# Altium PCB CSC 002B.PcbDoc (part 1 of 2)
Units mm, origin at the board's own origin, x right, y up, seen from the top; angles counter-clockwise.
Board outline 100 x 70 mm, 4 copper layers (L1, L2, L3, L4), stack 0.592 mm thick; 140 components, 186 nets, 819 pads, 384 vias.
Unrouted connection lines stored in the file: 1.
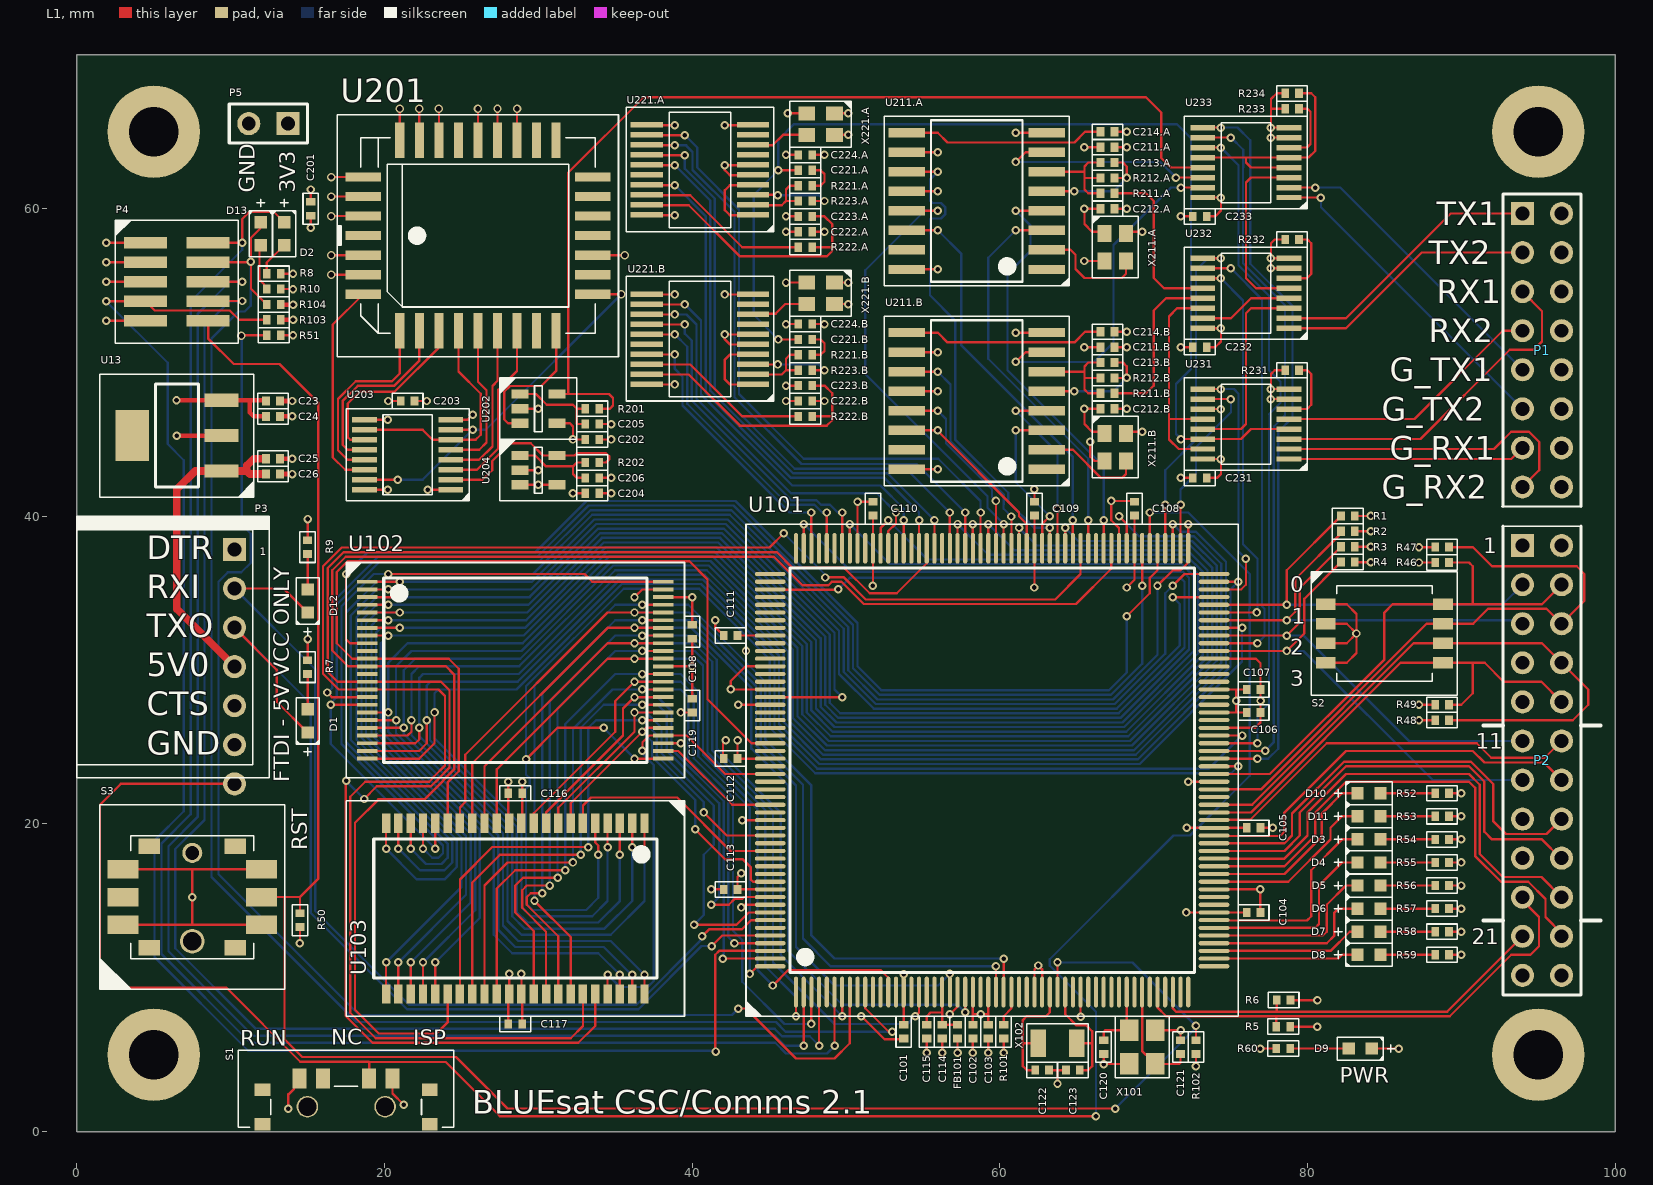
[diagram p0: L1 view]
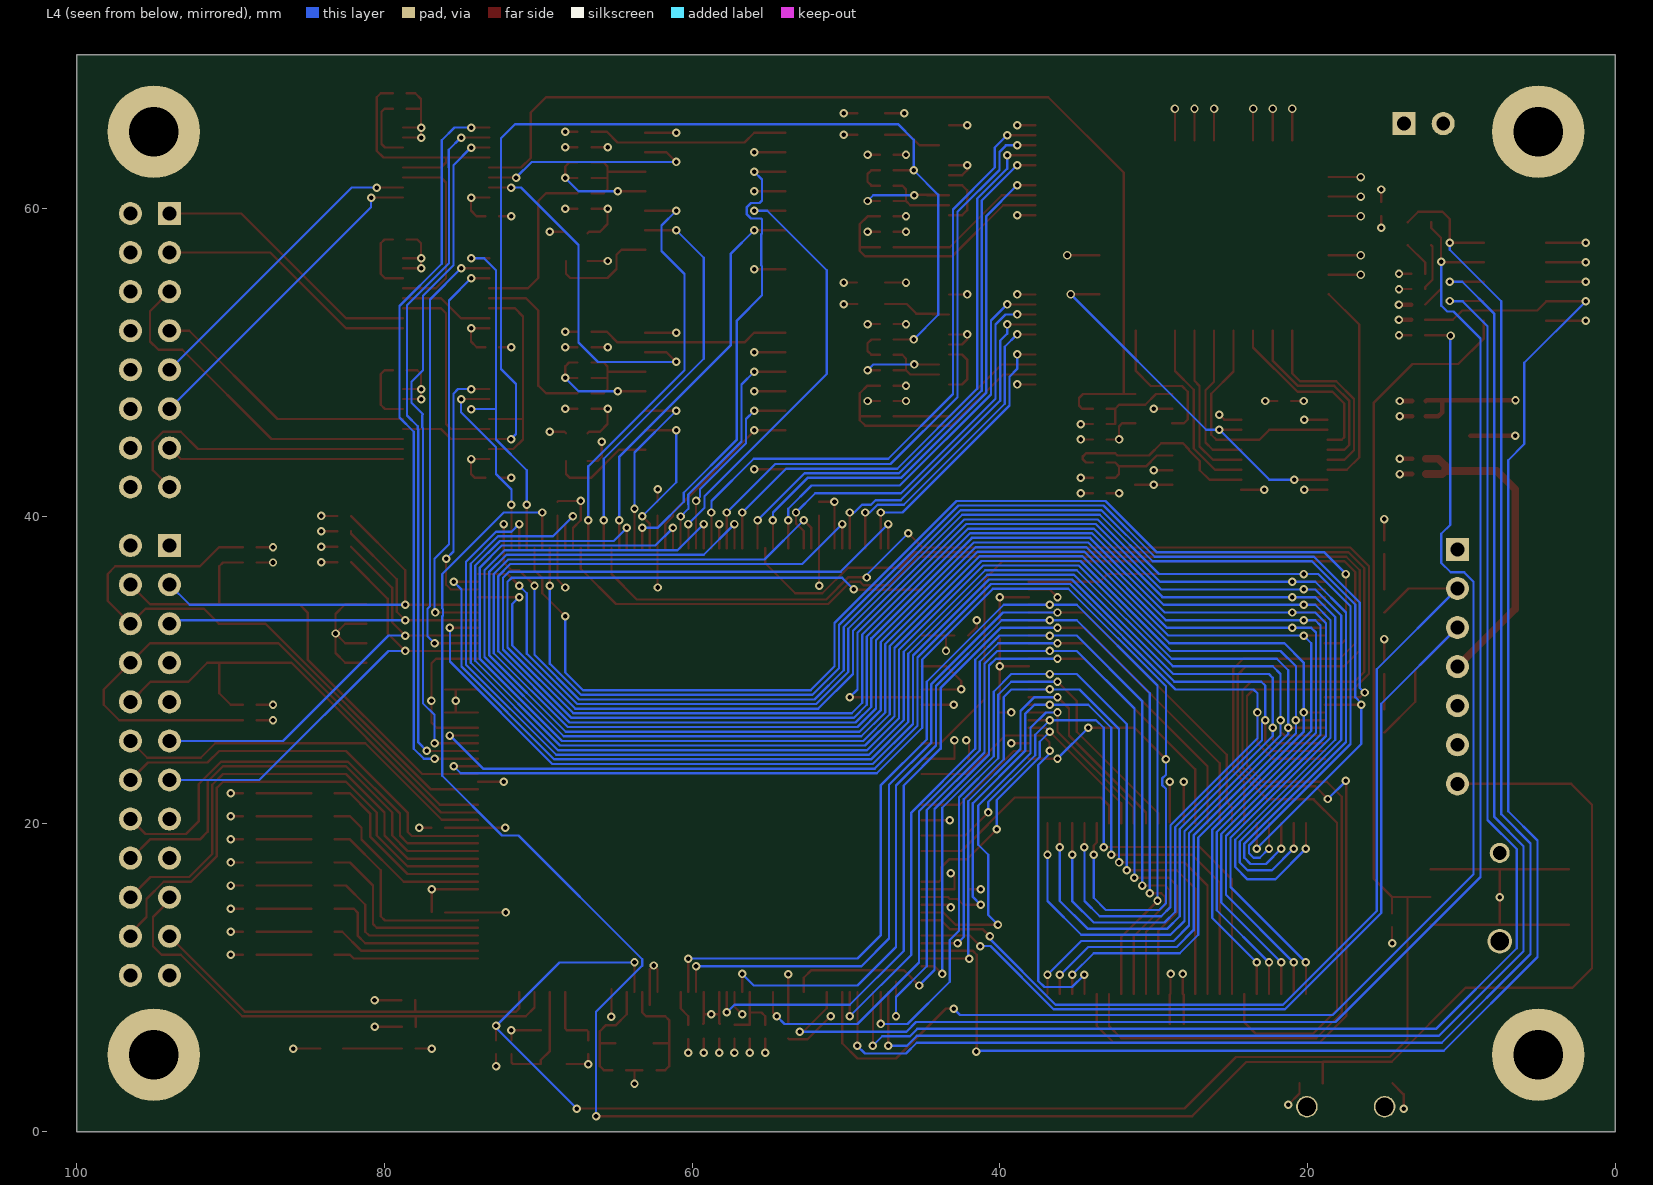
[diagram p1: L4 view, seen from below]
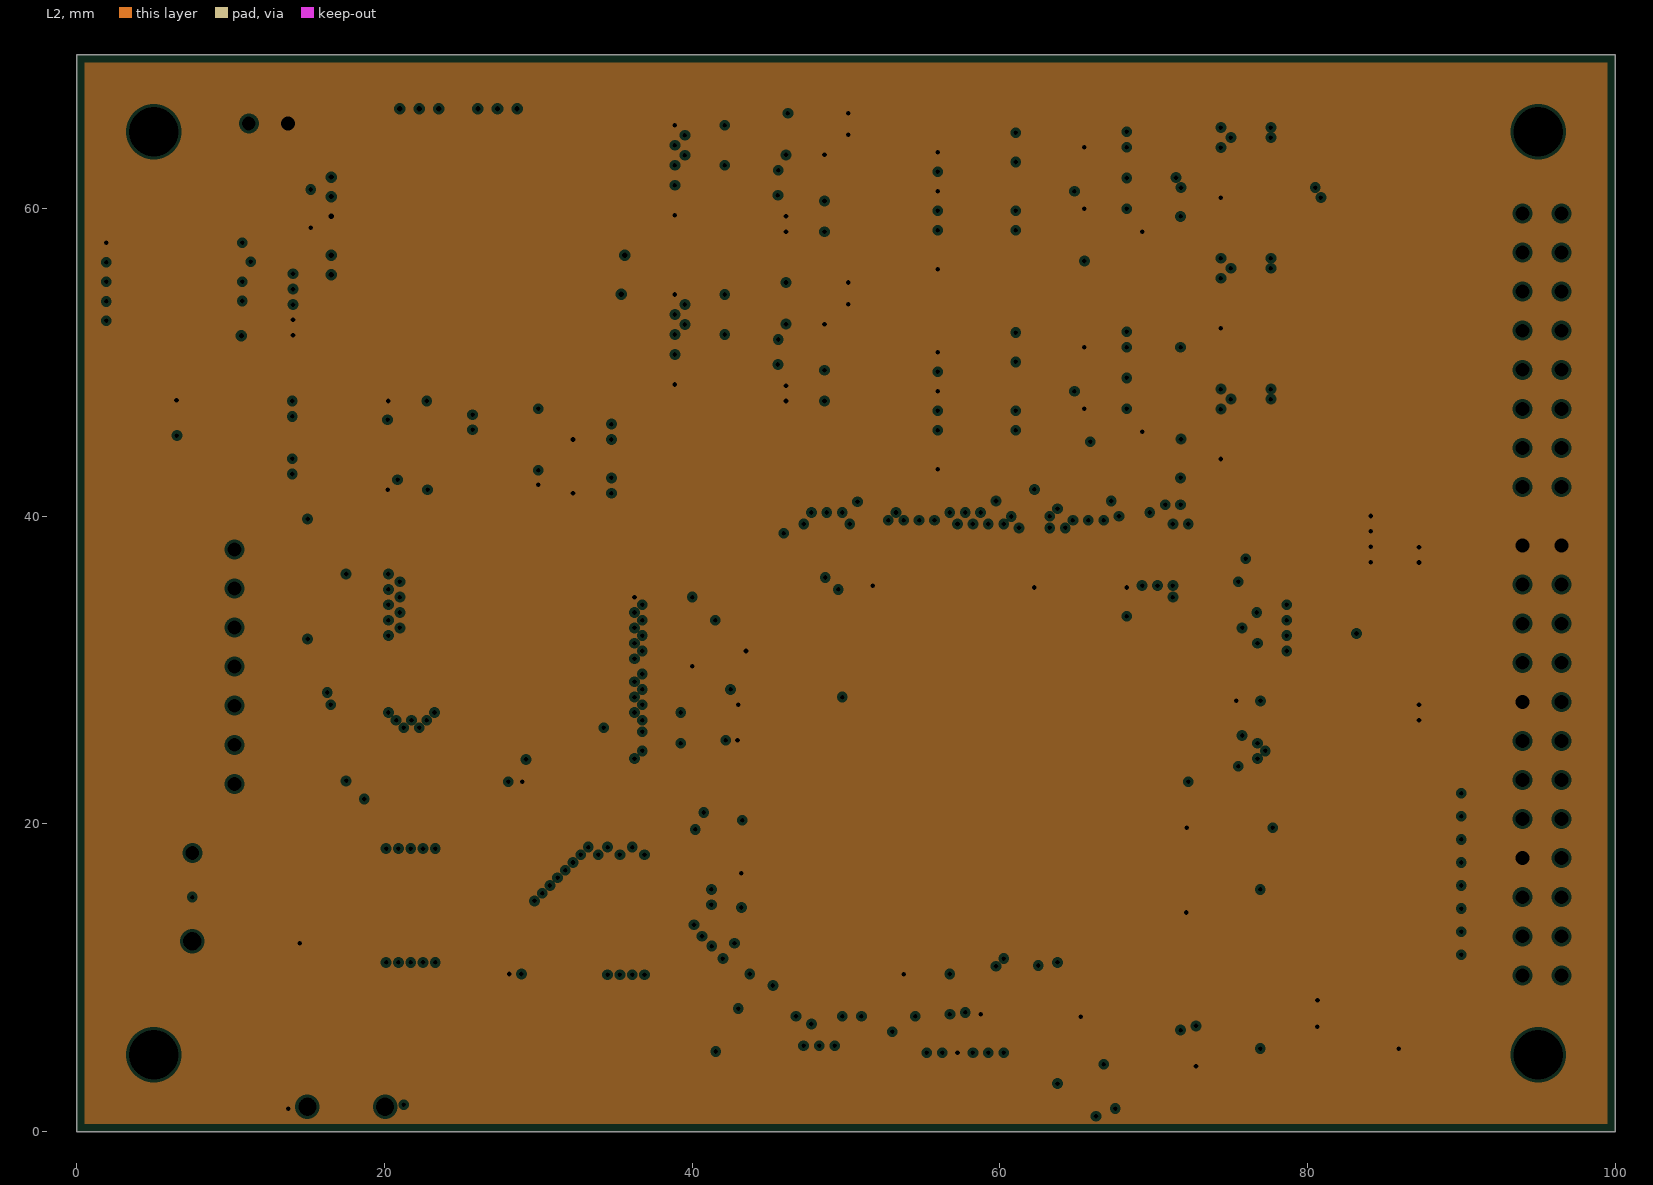
[diagram p2: L2, clearances drawn from the general rule]
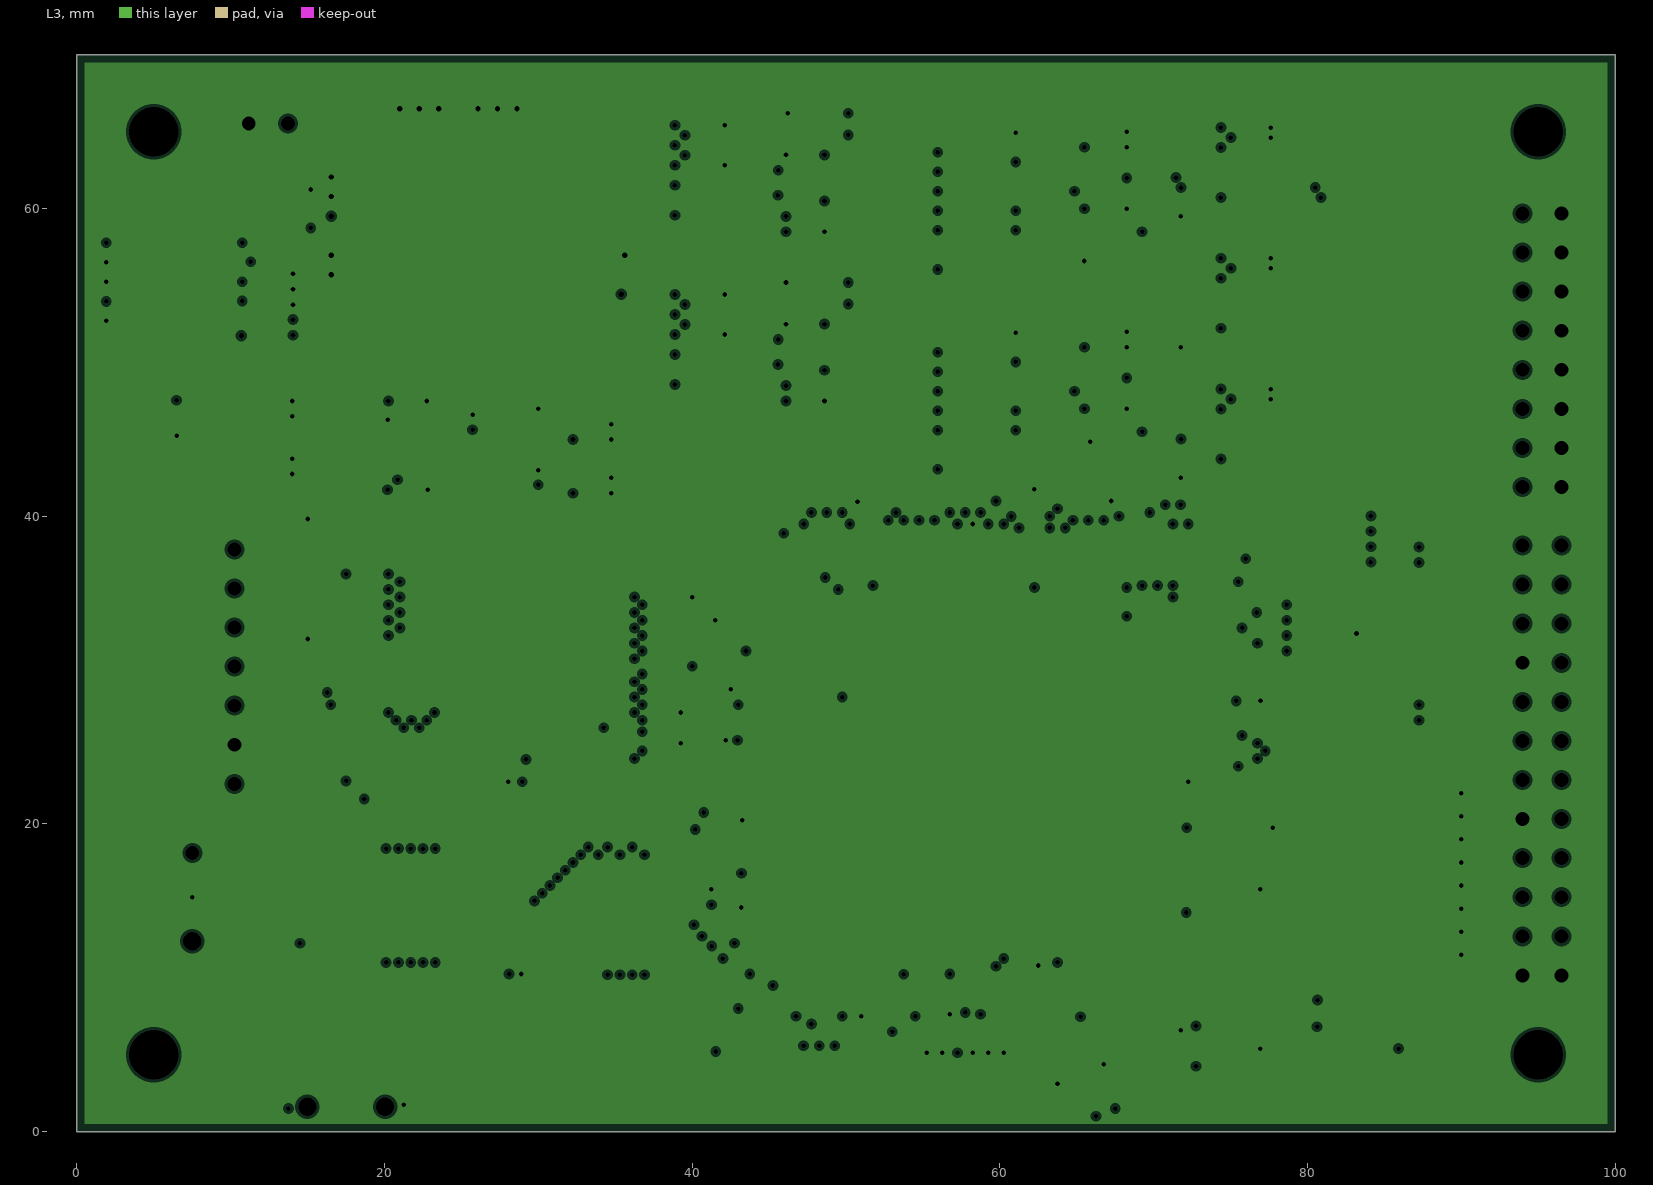
[diagram p3: L3, clearances drawn from the general rule]

## Layer stack, top to bottom
L1: signal copper 0.0356
Dielectric: prepreg 0.065, FR-4, Dk 4.8
L2: plane copper 0.0356, net 3V3
Dielectric: core 0.32, FR-4, Dk 4.8
L3: plane copper 0.0356, net GND
Dielectric: prepreg 0.065, FR-4, Dk 4.8
L4: signal copper 0.0356

## Board outline
0,70 0,0 100,0 100,70

## Design rules (kind name [scope] priority, off if disabled: settings)
AssemblyTestPointUsage [All] p1 off:
AssemblyTestpoint [All] p1 off: testpointundercomponent=TRUE minsize=1.016 maxsize=2.54 preferedsize=1.524 minholesize=0 maxholesize=1.016 preferedholesize=0.813 testpointgrid=0.025 usegrid=TRUE gridtolerance=0 allowsidetop=TRUE allowsidebottom=TRUE
Clearance [All] p1: gap=0.15
FabricationTestPointUsage [All] p1 off: valid=0 allowmultiple=FALSE
FabricationTestpoint [All] p1 off: side=3 testpointundercomponent=TRUE minsize=1.016 maxsize=2.54 preferedsize=1.524 minholesize=0 maxholesize=1.016 preferedholesize=0.813 testpointgrid=0.025 allowsidetop=TRUE allowsidebottom=TRUE usegrid=TRUE gridtolerance=0
HoleSize HoleSize_1 [All] p1: absolutevalues=TRUE maxlimit=3.7 minlimit=0.025 maxpercent=80.000 minpercent=20.000
HoleToHoleClearance [All] p1: gap=0.2 allowstackedmicrovias=TRUE
MinimumSolderMaskSliver [All] p1: minsoldermaskwidth=0.07
PlaneClearance [All] p1: clearance=0.2
PlaneConnect [All] p1: planeconnectstyle=Relief reliefexpansion=0.508 reliefentries=4 reliefconductorwidth=0.254 reliefairgap=0.254
PolygonConnect [All] p1: connectstyle=Relief reliefconductorwidth=0.254 reliefentries=4 polygonreliefangle="90 Angle" airgapwidth=0.254
RoomDefinition U_SwC_Main [InComponentClass('U_SwC_Main')] p1: confinementstyle=ConfineIn formatcopy=TRUE lockcomponents=FALSE outline 71.5,41.5 85,41.5 85,68.5 71.5,68.5
RoomDefinition D2 [InComponentClass('D2')] p2: confinementstyle=ConfineIn formatcopy=TRUE lockcomponents=FALSE outline 35.5,45.5 51.5,45.5 51.5,56.5 35.5,56.5
RoomDefinition D1 [InComponentClass('D1')] p3: confinementstyle=ConfineIn formatcopy=TRUE lockcomponents=FALSE outline 35.5,56.5 51.5,56.5 51.5,67.5 35.5,67.5
RoomDefinition Beacon [InComponentClass('Beacon')] p4: confinementstyle=ConfineIn formatcopy=TRUE lockcomponents=FALSE outline 14.475,40 37.5,40 37.5,67.5 14.475,67.5
RoomDefinition A2 [InComponentClass('A2')] p5: confinementstyle=ConfineIn formatcopy=TRUE lockcomponents=FALSE outline 51.5,41.5 71.5,41.5 71.5,54.5 51.5,54.5
RoomDefinition A1 [InComponentClass('A1')] p6: confinementstyle=ConfineIn formatcopy=TRUE lockcomponents=FALSE outline 51.5,54.5 71.5,54.5 71.5,67.5 51.5,67.5
RoutingTopology [All] p1: topology=Daisy_Balanced
RoutingVias BuriedVia [(StartLayer = 'L2')and(StopLayer = 'L3')] p1: holewidth=0.25 width=0.55 viastyle="Through Hole" minholewidth=0.25 minwidth=0.55 maxholewidth=0.25 maxwidth=0.55
RoutingVias ThroughVia [((StartLayer = 'L1') and (StopLayer = 'L4'))] p2: holewidth=0.25 width=0.6 viastyle="Through Hole" minholewidth=0.25 minwidth=0 maxholewidth=0.25 maxwidth=0.6
RoutingVias MicroVia [((StartLayer = 'L1') and (StopLayer = 'L2')) or ((StartLayer = 'L3') and (StopLayer = 'L4'))] p3: holewidth=0.1 width=0.3 viastyle="Through Hole" minholewidth=0.1 minwidth=0.3 maxholewidth=0.1 maxwidth=0.3
SilkToSilkClearance [All] p1: silktosilkclearance=0.1
SilkToSolderMaskClearance SilkscreenOverComponentPads [IsPad] p1: minsilkscreentomaskgap=0.1 clearancetoexposedcopper=TRUE
SolderMaskExpansion [All] p1: expansion=0.05
Width [All] p1: maxlimit=2 minlimit=0.1 preferedwidth=0.1
16 further rules are at their usual default settings.

## Classes and differential pairs
component class Designator: C23 C24 C25 C26 D1 D2 D3 D4 D5 D6 D7 D8 D9 D10 D11 D12 D13 P1 P2 P3 P4 P5 R1 R2 R3 R4 R5 R6 R7 R8 R9 R10 R46 R47 R48 R49 R50 R51 R52 R53 R54 R55 R56 R57 R58 R59 R60 S1 S2 S3 U13
net class LED[0..7]: LED0 LED1 LED2 LED3 LED4 LED5 LED6 LED7
net class EXT[0..9]: EXT0 EXT1 EXT2 EXT3 EXT4 EXT5 EXT6 EXT7 EXT8 EXT9
channel class COMS0003_DTMF: D1 D2
channel class COMS0002_AFSK: A1 A2
net class CONTROL.SWC[0..7]: CONTROL.SWC0 CONTROL.SWC1 CONTROL.SWC2 CONTROL.SWC3 CONTROL.SWC4 CONTROL.SWC5 CONTROL.SWC6 CONTROL.SWC7
net class CONTROL.DTMF2.Q[1..4]: CONTROL.DTMF2.Q1 CONTROL.DTMF2.Q2 CONTROL.DTMF2.Q3 CONTROL.DTMF2.Q4
net class CONTROL.DTMF1.Q[1..4]: CONTROL.DTMF1.Q1 CONTROL.DTMF1.Q2 CONTROL.DTMF1.Q3 CONTROL.DTMF1.Q4
net class ADDRESS[0..7]: ADDRESS0 ADDRESS1 ADDRESS2 ADDRESS3 ADDRESS4 ADDRESS5 ADDRESS6 ADDRESS7
component class U_SwC_Main: 243 C231 C232 C233 C241 C251 C261 R231 R232 R233 R234 R241 R251 R252 R261 U231 U232 U233
component class D2: C221.B C221_D2 C222.B C222_D2 C223.B C223_D2 C224.B C224_D2 R221.B R221_D2 R222.B R222_D2 R223.B R223_D2 U221.B U221_D2 X221.B X221_D2
component class D1: C221.A C221_D1 C222.A C222_D1 C223.A C223_D1 C224.A C224_D1 R221.A R221_D1 R222.A R222_D1 R223.A R223_D1 U221.A U221_D1 X221.A X221_D1
component class Beacon: C201 C202 C203 C204 C205 C206 R201 R202 U201 U202 U203 U204
component class A2: C211.B C211_A2 C212.B C212_A2 C213.B C213_A2 C214.B C214_A2 R211.B R211_A2 R212.B R212_A2 U211.B U211_A2 X211.B X211_A2
component class A1: C211.A C211_A1 C212.A C212_A1 C213.A C213_A1 C214.A C214_A1 R211.A R211_A1 R212.A R212_A1 U211.A U211_A1 X211.A X211_A1
net class A[0..19]: A0 A1 A2 A3 A4 A5 A6 A7 A8 A9 A10 A11 A12 A13 A14 A15 A16 A17 A18 A19
net class D[0..15]: D0 D1 D2 D3 D4 D5 D6 D7 D8 D9 D10 D11 D12 D13 D14 D15
component class CRSC0002: C14 C101 C102 C103 C104 C105 C106 C107 C108 C109 C110 C111 C112 C113 C114 C115 C116 C117 C118 C119 C120 C121 C122 C123 FB101 Q101 Q102 R101 R102 R103 R104 U101 U102 U103 X101 X102

## Components (designator, comment, footprint, x,y, rotation, side; value= is the part's Value field where it differs from the comment)
C23 "Cap 0402" CAPC1005X06L 12.75,47.5 r180 top
C24 "Cap 0402" CAPC1005X06L 12.75,46.5 r180 top
C25 "Cap 0402" CAPC1005X06L 12.75,43.75 r180 top
C26 "Cap 0402" CAPC1005X06L 12.75,42.75 r180 top
C101 "Cap 0402" CAPC1005X06L 53.75,6.5 r90 top
C102 "Cap 0402" CAPC1005X06L 58.25,6.5 r90 top
C103 "Cap 0402" CAPC1005X06L 59.25,6.5 r90 top
C104 "Cap 0402" CAPC1005X06L 76.5,14.25 r180 top
C105 "Cap 0402" CAPC1005X06L 76.5,19.75 r180 top
C106 "Cap 0402" CAPC1005X06L 76.5,27.25 r180 top
C107 "Cap 0402" CAPC1005X06L 76.5,28.75 r180 top
C108 "Cap 0402" CAPC1005X06L 68.75,40.5 r270 top
C109 "Cap 0402" CAPC1005X06L 62.25,40.5 r270 top
C110 "Cap 0402" CAPC1005X06L 51.75,40.5 r270 top
C111 "Cap 0402" CAPC1005X06L 42.5,32.25 r0 top
C112 "Cap 0402" CAPC1005X06L 42.5,24.25 r0 top
C113 "Cap 0402" CAPC1005X06L 42.5,15.75 r0 top
C114 "Cap 0402" CAPC1005X06L 56.25,6.5 r90 top
C115 "Cap 0402" CAPC1005X06L 55.25,6.5 r90 top
C116 "Cap 0402" CAPC1005X06L 28.5,22 r0 top
C117 "Cap 0402" CAPC1005X06L 28.5,7 r180 top
C118 "Cap 0402" CAPC1005X06L 40,32.5 r270 top
C119 "Cap 0402" CAPC1005X06L 40,27.7 r90 top
C120 "Cap 0402" CAPC1005X06L 66.75,5.5 r270 top
C121 "Cap 0402" CAPC1005X06L 71.75,5.5 r270 top
C122 "Cap 0402" CAPC1005X06L 62.75,4 r0 top
C123 "Cap 0402" CAPC1005X06L 64.75,4 r0 top
C201 "Cap 0402" CAPC1005X06L 15.2,60 r90 top
C202 "Cap 0402" CAPC1005X06L 33.5,45 r0 top
C203 "Cap 0402" CAPC1005X06L 21.5,47.5 r0 top
C204 "Cap 0402" CAPC1005X06L 33.5,41.5 r180 top
C205 "Cap 0402" CAPC1005X06L 33.5,46 r180 top
C206 "Cap 0402" CAPC1005X06L 33.5,42.5 r180 top
C211.A "Cap 0402" CAPC1005X06L 67,64 r180 top (schematic designator C211)
C211.B "Cap 0402" CAPC1005X06L 67,51 r180 top (schematic designator C211)
C212.A "Cap 0402" CAPC1005X06L 67,60 r180 top (schematic designator C212)
C212.B "Cap 0402" CAPC1005X06L 67,47 r180 top (schematic designator C212)
C213.A "Cap 0402" CAPC1005X06L 67,63 r180 top (schematic designator C213)
C213.B "Cap 0402" CAPC1005X06L 67,50 r180 top (schematic designator C213)
C214.A "Cap 0402" CAPC1005X06L 67,65 r180 top (schematic designator C214)
C214.B "Cap 0402" CAPC1005X06L 67,52 r180 top (schematic designator C214)
C221.A "Cap 0402" CAPC1005X06L 47.35,62.5 r180 top (schematic designator C221)
C221.B "Cap 0402" CAPC1005X06L 47.35,51.5 r180 top (schematic designator C221)
C222.A "Cap 0402" CAPC1005X06L 47.35,58.5 r180 top (schematic designator C222)
C222.B "Cap 0402" CAPC1005X06L 47.35,47.5 r180 top (schematic designator C222)
C223.A "Cap 0402" CAPC1005X06L 47.35,59.5 r0 top (schematic designator C223)
C223.B "Cap 0402" CAPC1005X06L 47.35,48.5 r0 top (schematic designator C223)
C224.A "Cap 0402" CAPC1005X06L 47.35,63.5 r180 top (schematic designator C224)
C224.B "Cap 0402" CAPC1005X06L 47.35,52.5 r180 top (schematic designator C224)
C231 "Cap 0402" CAPC1005X06L 73,42.5 r0 top
C232 "Cap 0402" CAPC1005X06L 73,51 r0 top
C233 "Cap 0402" CAPC1005X06L 73,59.5 r0 top
D1 "LED - ASMT-Rx45" ASMT-Rx45 15,26.7 r90 top
D2 "LED - ASMT-Rx45" ASMT-Rx45 13.475,58.375 r270 top
D3 "LED - ASMT-Rx45" ASMT-Rx45 84,19 r0 top
D4 "LED - ASMT-Rx45" ASMT-Rx45 84,17.5 r0 top
D5 "LED - ASMT-Rx45" ASMT-Rx45 84,16 r0 top
D6 "LED - ASMT-Rx45" ASMT-Rx45 84,14.5 r0 top
D7 "LED - ASMT-Rx45" ASMT-Rx45 84,13 r0 top
D8 "LED - ASMT-Rx45" ASMT-Rx45 84,11.5 r0 top
D9 "LED - ASMT-Rx45" ASMT-Rx45 83.425,5.4 r180 top
D10 "LED - ASMT-Rx45" ASMT-Rx45 84,22 r0 top
D11 "LED - ASMT-Rx45" ASMT-Rx45 84,20.5 r0 top
D12 "LED - ASMT-Rx45" ASMT-Rx45 15,34.5 r90 top
D13 "LED - ASMT-Rx45" ASMT-Rx45 11.95,58.375 r270 top
FB101 "Ferite Bead 0402" INDC1005X06L 57.25,6.5 r90 top
P1 "Header 8X2" HDR2X8 93.98,59.69 r270 top
P2 "Header 12X2" HDR2X12 93.98,38.1 r270 top
P3 "FTDI Basic" "FTDI BASIC" 0,31.5 r0 top
P4 "Cortex Debug Connector" FTSH-105-01-L-DV-TR 6.5,55.25 r270 top
P5 "Header 2" HDR1X2 13.716,65.532 r180 top
R1 "Res3" RESC1005X06L 82.625,40.025 r0 top
R2 "Res3" RESC1005X06L 82.625,39.025 r0 top
R3 "Res3" RESC1005X06L 82.625,38.025 r0 top
R4 "Res3" RESC1005X06L 82.625,37.025 r0 top
R5 "Res3" RESC1005X06L 78.425,6.825 r0 top
R6 "Res3" RESC1005X06L 78.45,8.55 r0 top
R7 "Res3" RESC1005X06L 15,30.2 r90 top
R8 "Res3" RESC1005X06L 12.8,55.775 r0 top
R9 "Res3" RESC1005X06L 15,38 r90 top
R10 "Res3" RESC1005X06L 12.8,54.775 r0 top
R46 "Res3" RESC1005X06L 88.75,37 r0 top
R47 "Res3" RESC1005X06L 88.75,38 r0 top
R48 "Res3" RESC1005X06L 88.75,26.75 r0 top
R49 "Res3" RESC1005X06L 88.75,27.75 r0 top
R50 "Res3" RESC1005X06L 14.5,13.75 r90 top
R51 "Res3" RESC1005X06L 12.8,51.775 r0 top
R52 "Res3" RESC1005X06L 88.75,22 r0 top
R53 "Res3" RESC1005X06L 88.75,20.5 r0 top
R54 "Res3" RESC1005X06L 88.75,19 r0 top
R55 "Res3" RESC1005X06L 88.75,17.5 r0 top
R56 "Res3" RESC1005X06L 88.75,16 r0 top
R57 "Res3" RESC1005X06L 88.75,14.5 r0 top
R58 "Res3" RESC1005X06L 88.75,13 r0 top
R59 "Res3" RESC1005X06L 88.75,11.5 r0 top
R60 "Res3" RESC1005X06L 78.425,5.4 r180 top
R101 "Res3" RESC1005X06L 60.25,6.5 r270 top
R102 "Res3" RESC1005X06L 72.75,5.5 r270 top
R103 "Res3" RESC1005X06L 12.8,52.775 r0 top
R104 "Res3" RESC1005X06L 12.8,53.775 r0 top
R201 "Res3" RESC1005X06L 33.5,47 r180 top
R202 "Res3" RESC1005X06L 33.5,43.5 r180 top
R211.A "Res3" RESC1005X06L 67,61 r0 top (schematic designator R211)
R211.B "Res3" RESC1005X06L 67,48 r0 top (schematic designator R211)
R212.A "Res3" RESC1005X06L 67,62 r0 top (schematic designator R212)
R212.B "Res3" RESC1005X06L 67,49 r0 top (schematic designator R212)
R221.A "Res3" RESC1005X06L 47.35,61.5 r180 top (schematic designator R221)
R221.B "Res3" RESC1005X06L 47.35,50.5 r180 top (schematic designator R221)
R222.A "Res3" RESC1005X06L 47.35,57.5 r180 top (schematic designator R222)
R222.B "Res3" RESC1005X06L 47.35,46.5 r180 top (schematic designator R222)
R223.A "Res3" RESC1005X06L 47.35,60.5 r0 top (schematic designator R223)
R223.B "Res3" RESC1005X06L 47.35,49.5 r0 top (schematic designator R223)
R231 "Res3" RESC1005X06L 79,49.5 r180 top
R232 "Res3" RESC1005X06L 79,58 r180 top
R233 "Res3" RESC1005X06L 79,66.5 r180 top
R234 "Res3" RESC1005X06L 79,67.5 r0 top
S1 "MLL1300S" MILL1300S 17.5,0.3 r0 top
S2 "SW-DIP4" PCBComponent_1 85,32.385 r270 top
S3 "KS2A" K5A2 7.5,15.25 r90 top
U13 "MIC5200" SOT230P710X170-4L 6.5,45.25 r180 top
U101 "LPC2468FBD208" TSQFP50P3000X3000X160-208L 59.5,23.5 r90 top
U102 "CY62167DV30LL" TSSOP50P2000X120-48L 28.5,30 r0 top
U103 "FM22L16-55-TG" TSOP80P1180X120-44L 28.5,14.5 r180 top
U201 "AT27LV512A" PLCC7*9 26.075,58.25 r90 top
U202 "IttyBitty Timer" SOT23-5 30,47 r0 top
U203 "CD4520BPW" TSSOP16 21.5,44 r90 top
U204 "IttyBitty Timer" SOT23-5 30,43 r0 top
U211.A "MX614TN" SOIC16 58.5,60.5 r180 top (schematic designator U211)
U211.B "MX614TN" SOIC16 58.5,47.5 r180 top (schematic designator U211)
U221.A "MT88L70AN" TSSOP20 40.5,62.5 r90 top (schematic designator U221)
U221.B "MT88L70AN" TSSOP20 40.5,51.5 r90 top (schematic designator U221)
U231 "CD4053BCM" TSSOP16 76,46 r90 top
U232 "CD4053BCM" TSSOP16 76,54.5 r90 top
U233 "CD4051BCM" TSSOP16 76,63 r90 top
X101 "Crystal Oscilator" 7M 69.25,5.5 r270 top
X102 "Crystal Oscilator" "9H T10" 63.75,5.75 r180 top
X211.A "ECS-2025-035" ECS-2025 67.5,57.5 r270 top (schematic designator X211)
X211.B "ECS-2025-035" ECS-2025 67.5,44.5 r270 top (schematic designator X211)
X221.A "ECS-2025-035" ECS-2025 48.35,65.5 r180 top (schematic designator X221)
X221.B "ECS-2025-035" ECS-2025 48.35,54.5 r180 top (schematic designator X221)

## Footprints (in the part's own frame and the unit in brackets; to place one, negate y for a bottom-side part, rotate by r counter-clockwise, add the part's x,y. Pads: shape width x height; smd on the part's side, far side on the other; paste and mask are expansions set on the pad)
7M [mm]
  rect 1.4x1.2 smd: 1(-1.1,-0.85) 2(1.1,0.85) 3(-1.1,0.85) 3(1.1,-0.85)
  silkscreen extent -2,-1.75 2,1.75, body extent -1.6,-1.25 1.6,1.25, height 0.75
"9H T10" [mm]
  rect 1x1.8 smd: 1(-1.25,0) 2(1.25,0)
  silkscreen extent -2,-1.25 2,1.25, body extent -1.6,-0.75 1.6,0.75, height 0.75
ASMT-Rx45 [mm]
  rect 0.8x0.8 smd: 1(-0.75,0) 2(0.75,0)
  silkscreen extent -2.25,-0.75 1.5,0.75, body extent -0.8,-0.4 0.8,0.4, height 0.45
CAPC1005X06L [mm] "Chip Capacitor, 2-Leads, Body 1.0x0.5mm, IPC High Density"
  rect 0.5x0.6 smd: 1(-0.45,0) 2(0.45,0)
  silkscreen extent -1,-0.5 1,0.5, body extent -0.53,-0.28 0.53,0.27, height 0.55
ECS-2025 [mm] "SMD Clock Oscillator"
  rect 1.1x0.9 smd: 1(-0.9,-0.7) 2(0.9,-0.7) 3(0.9,0.7) 4(-0.9,0.7)
  silkscreen extent -2,-1.5 2,1.5, body extent -1.25,-1 1.25,1, height 0.9
"FTDI BASIC" [mm]
  rect 1.5x1.5 hole 0.9: 1(10.25,6.35)
  round 1.5 hole 0.9: 2(10.25,3.81) 3(10.25,1.27) 4(10.25,-1.27) 5(10.25,-3.81) 6(10.25,-6.35)
  silkscreen extent 0,-8.5 12.5,8.5, body extent -0.02,-7.62 10.55,7.62, height 2.51
FTSH-105-01-L-DV-TR [mil] "http://www.samtec.com/ftppub/cpdf/FTSHMKT1.PDF"
  rect 29x110 smd: 1(-100,-80) 2(-100,80) 3(-50,-80) 4(-50,80) 5(0,-80) 6(0,80) 7(50,-80) 8(50,80) 9(100,-80) 10(100,80)
  silkscreen extent -157,-157 157,157, body extent -125,-115 125,115, height 234
HDR1X2 [mm] "Connector; Header; 2 Position"
  rect 1.5x1.5 hole 0.9: 1(0,0)
  round 1.5 hole 0.9: 2(2.54,0)
  silkscreen extent -1.27,-1.27 3.81,1.27
HDR2X8 [mm] "Connector; Header; 8x2 Position"
  rect 1.5x1.5 hole 0.9: 1(0,0)
  round 1.5 hole 0.9: 2(0,2.54) 3(2.54,0) 4(2.54,2.54) 5(5.08,0) 6(5.08,2.54) 7(7.62,0) 8(7.62,2.54) 9(10.16,0) 10(10.16,2.54) 11(12.7,0) 12(12.7,2.54) 13(15.24,0) 14(15.24,2.54) 15(17.78,0) 16(17.78,2.54)
  silkscreen extent -1.27,-1.27 19.05,3.81
HDR2X12 [mm] "Connector; Header; 12x2 Position"
  rect 1.5x1.5 hole 0.9: 1(0,0)
  round 1.5 hole 0.9: 2(0,2.54) 3(2.54,0) 4(2.54,2.54) 5(5.08,0) 6(5.08,2.54) 7(7.62,0) 8(7.62,2.54) 9(10.16,0) 10(10.16,2.54) 11(12.7,0) 12(12.7,2.54) 13(15.24,0) 14(15.24,2.54) 15(17.78,0) 16(17.78,2.54) 17(20.32,0) 18(20.32,2.54) 19(22.86,0) 20(22.86,2.54) 21(25.4,0) 22(25.4,2.54) 23(27.94,0) 24(27.94,2.54)
  silkscreen extent -1.27,-1.27 29.21,3.81
INDC1005X06L [mm] "Chip Inductor, 2-Leads, Body 1.0x0.5mm, IPC High Density"
  rect 0.5x0.6 smd: 1(-0.45,0) 2(0.45,0)
  silkscreen extent -1,-0.5 1,0.5, body extent -0.53,-0.28 0.53,0.27, height 0.55
K5A2 [mm]
  rect 1x1.42 smd: 0(-3.3,-2.8) 0(-3.3,2.8) 8(3.3,-2.8) 9(3.3,2.8)
  round 1.6 hole 1.2: 0(-2.875,0)
  round 1.3 hole 0.9: 0(2.875,0)
  rect 1.2x2 smd: 1(-1.8,4.5) 2(0,4.5) 3(1.8,4.5) 4(-1.8,-4.5) 5(0,-4.5) 6(1.8,-4.5)
  silkscreen extent -6,-6 6,6, body extent -4.13,-4 4.13,4, height 4.55
MILL1300S [mil]
  rect 40x32 smd: 0(-214,7) 0(-214,96) 0(214,7) 0(214,96)
  round 55.12 hole 46.46 paste+0 mask+0: 0(-99,52) 0(100,52)
  rect 36x52 smd: 1(-119,124) 2(-59,124) 3(59,124) 4(119,124)
  silkscreen extent -276,0 276,197, body extent -213,-60 213,139, height 56
PCBComponent_1 [mm]
  rect 0.76x1.27 smd: 1(-1.905,-3.81) 2(-0.635,-3.81) 3(0.635,-3.81) 4(1.905,-3.81) 5(1.905,3.81) 6(0.635,3.81) 7(-0.635,3.81) 8(-1.905,3.81)
  silkscreen extent -4,-4.75 4,4.75, body extent -3.1,-4.06 3.1,4.06, height 2.31
PLCC7*9 [mm] "PLCC, 32-Leads, Body 15.1x15.1mm (max), Pitch 1.270mm, IPC Medium Density"
  rect 0.6x2.3 smd: 1(0,7.46) 2(-1.27,7.46) 3(-2.54,7.46) 4(-3.81,7.46) 14(-3.81,-7.46) 15(-2.54,-7.46) 16(-1.27,-7.46) 17(0,-7.46) 18(1.27,-7.46) 19(2.54,-7.46) 20(3.81,-7.46) 30(3.81,7.46) 31(2.54,7.46) 32(1.27,7.46)
  rect 2.3x0.6 smd: 5(-6.19,5.08) 6(-6.19,3.81) 7(-6.19,2.54) 8(-6.19,1.27) 9(-6.19,0) 10(-6.19,-1.27) 11(-6.19,-2.54) 12(-6.19,-3.81) 13(-6.19,-5.08) 21(6.19,-5.08) 22(6.19,-3.81) 23(6.19,-2.54) 24(6.19,-1.27) 25(6.19,0) 26(6.19,1.27) 27(6.19,2.54) 28(6.19,3.81) 29(6.19,5.08)
  silkscreen extent -7.87,-9.14 7.87,9.14, body extent -6.35,-7.62 6.35,7.62, height 3.56
RESC1005X06L [mm] "Chip Resistor, 2-Leads, Body 1.0x0.5mm, IPC High Density"
  rect 0.5x0.6 smd: 1(-0.45,0) 2(0.45,0)
  silkscreen extent -1,-0.5 1,0.5, body extent -0.53,-0.28 0.53,0.27, height 0.55
SOIC16 [mm] "SOIC, 16-Leads, Body 10.5x7.6mm (max), Pitch 1.27mm, IPC Medium Density"
  rect 2.35x0.6 smd: 1(-4.55,4.445) 2(-4.55,3.175) 3(-4.55,1.905) 4(-4.55,0.635) 5(-4.55,-0.635) 6(-4.55,-1.905) 7(-4.55,-3.175) 8(-4.55,-4.445) 9(4.55,-4.445) 10(4.55,-3.175) 11(4.55,-1.905) 12(4.55,-0.635) 13(4.55,0.635) 14(4.55,1.905) 15(4.55,3.175) 16(4.55,4.445)
  silkscreen extent -6,-5.5 6,5.5, body extent -3.8,-5.24 3.79,5.25, height 2.67
SOT23-5 [mm] "SOT23, 5-Leads, Body 3.0x3.0mm (max), Pitch 0.95mm, IPC Medium Density"
  rect 1.1x0.6 smd: 1(-1.2,0.95) 2(-1.2,0) 3(-1.2,-0.95) 4(1.2,-0.95) 5(1.2,0.95)
  silkscreen extent -2.5,-2 2.5,2, body extent -0.85,-1.5 0.85,1.5, height 1.45
SOT230P710X170-4L [mm] "SOT223, 4-Leads, Body 6.7x7.5mm (max), Pitch 2.30mm, IPC High Density"
  rect 2.2x0.85 smd: 1(-2.9,2.3) 2(-2.9,0) 3(-2.9,-2.3)
  rect 2.2x3.3 smd: 4(2.9,0)
  silkscreen extent -5,-4 5,4, body extent -1.86,-3.35 1.86,3.35, height 1.7
TSOP80P1180X120-44L [mm] "TSOP, 44-Leads, Body 18.4x10.2mm (max), Pitch 0.80mm, IPC High Density"
  rect 0.55x1.25 smd: 1(-8.4,-5.55) 2(-7.6,-5.55) 3(-6.8,-5.55) 4(-6,-5.55) 5(-5.2,-5.55) 6(-4.4,-5.55) 7(-3.6,-5.55) 8(-2.8,-5.55) 9(-2,-5.55) 10(-1.2,-5.55) 11(-0.4,-5.55) 12(0.4,-5.55) 13(1.2,-5.55) 14(2,-5.55) 15(2.8,-5.55) 16(3.6,-5.55) 17(4.4,-5.55) 18(5.2,-5.55) 19(6,-5.55) 20(6.8,-5.55) 21(7.6,-5.55) 22(8.4,-5.55) 23(8.4,5.55) 24(7.6,5.55) 25(6.8,5.55) 26(6,5.55) 27(5.2,5.55) 28(4.4,5.55) 29(3.6,5.55) 30(2.8,5.55) 31(2,5.55) 32(1.2,5.55) 33(0.4,5.55) 34(-0.4,5.55) 35(-1.2,5.55) 36(-2,5.55) 37(-2.8,5.55) 38(-3.6,5.55) 39(-4.4,5.55) 40(-5.2,5.55) 41(-6,5.55) 42(-6.8,5.55) 43(-7.6,5.55) 44(-8.4,5.55)
  silkscreen extent -11,-7 11,7, body extent -9.21,-5.08 9.21,5.08, height 1.2
TSQFP50P3000X3000X160-208L [mm] "TSQFP, 208-Leads, Body 30.1x30.1mm (max), Pitch 0.50mm, IPC High Density"
  oval 2x0.27 smd: 1(-14.425,12.75) 2(-14.425,12.25) 3(-14.425,11.75) 4(-14.425,11.25) 5(-14.425,10.75) 6(-14.425,10.25) 7(-14.425,9.75) 8(-14.425,9.25) 9(-14.425,8.75) 10(-14.425,8.25) 11(-14.425,7.75) 12(-14.425,7.25) 13(-14.425,6.75) 14(-14.425,6.25) 15(-14.425,5.75) 16(-14.425,5.25) 17(-14.425,4.75) 18(-14.425,4.25) 19(-14.425,3.75) 20(-14.425,3.25) 21(-14.425,2.75) 22(-14.425,2.25) 23(-14.425,1.75) 24(-14.425,1.25) 25(-14.425,0.75) 26(-14.425,0.25) 27(-14.425,-0.25) 28(-14.425,-0.75) 29(-14.425,-1.25) 30(-14.425,-1.75) 31(-14.425,-2.25) 32(-14.425,-2.75) 33(-14.425,-3.25) 34(-14.425,-3.75) 35(-14.425,-4.25) 36(-14.425,-4.75) 37(-14.425,-5.25) 38(-14.425,-5.75) 39(-14.425,-6.25) 40(-14.425,-6.75) 41(-14.425,-7.25) 42(-14.425,-7.75) 43(-14.425,-8.25) 44(-14.425,-8.75) 45(-14.425,-9.25) 46(-14.425,-9.75) 47(-14.425,-10.25) 48(-14.425,-10.75) 49(-14.425,-11.25) 50(-14.425,-11.75) 51(-14.425,-12.25) 52(-14.425,-12.75) 105(14.425,-12.75) 106(14.425,-12.25) 107(14.425,-11.75) 108(14.425,-11.25) 109(14.425,-10.75) 110(14.425,-10.25) 111(14.425,-9.75) 112(14.425,-9.25) 113(14.425,-8.75) 114(14.425,-8.25) 115(14.425,-7.75) 116(14.425,-7.25) 117(14.425,-6.75) 118(14.425,-6.25) 119(14.425,-5.75) 120(14.425,-5.25) 121(14.425,-4.75) 122(14.425,-4.25) 123(14.425,-3.75) 124(14.425,-3.25) 125(14.425,-2.75) 126(14.425,-2.25) 127(14.425,-1.75) 128(14.425,-1.25) 129(14.425,-0.75) 130(14.425,-0.25) 131(14.425,0.25) 132(14.425,0.75) 133(14.425,1.25) 134(14.425,1.75) 135(14.425,2.25) 136(14.425,2.75) 137(14.425,3.25) 138(14.425,3.75) 139(14.425,4.25) 140(14.425,4.75) 141(14.425,5.25) 142(14.425,5.75) 143(14.425,6.25) 144(14.425,6.75) 145(14.425,7.25) 146(14.425,7.75) 147(14.425,8.25) 148(14.425,8.75) 149(14.425,9.25) 150(14.425,9.75) 151(14.425,10.25) 152(14.425,10.75) 153(14.425,11.25) 154(14.425,11.75) 155(14.425,12.25) 156(14.425,12.75)
  oval 0.27x2 smd: 53(-12.75,-14.425) 54(-12.25,-14.425) 55(-11.75,-14.425) 56(-11.25,-14.425) 57(-10.75,-14.425) 58(-10.25,-14.425) 59(-9.75,-14.425) 60(-9.25,-14.425) 61(-8.75,-14.425) 62(-8.25,-14.425) 63(-7.75,-14.425) 64(-7.25,-14.425) 65(-6.75,-14.425) 66(-6.25,-14.425) 67(-5.75,-14.425) 68(-5.25,-14.425) 69(-4.75,-14.425) 70(-4.25,-14.425) 71(-3.75,-14.425) 72(-3.25,-14.425) 73(-2.75,-14.425) 74(-2.25,-14.425) 75(-1.75,-14.425) 76(-1.25,-14.425) 77(-0.75,-14.425) 78(-0.25,-14.425) 79(0.25,-14.425) 80(0.75,-14.425) 81(1.25,-14.425) 82(1.75,-14.425) 83(2.25,-14.425) 84(2.75,-14.425) 85(3.25,-14.425) 86(3.75,-14.425) 87(4.25,-14.425) 88(4.75,-14.425) 89(5.25,-14.425) 90(5.75,-14.425) 91(6.25,-14.425) 92(6.75,-14.425) 93(7.25,-14.425) 94(7.75,-14.425) 95(8.25,-14.425) 96(8.75,-14.425) 97(9.25,-14.425) 98(9.75,-14.425) 99(10.25,-14.425) 100(10.75,-14.425) 101(11.25,-14.425) 102(11.75,-14.425) 103(12.25,-14.425) 104(12.75,-14.425) 157(12.75,14.425) 158(12.25,14.425) 159(11.75,14.425) 160(11.25,14.425) 161(10.75,14.425) 162(10.25,14.425) 163(9.75,14.425) 164(9.25,14.425) 165(8.75,14.425) 166(8.25,14.425) 167(7.75,14.425) 168(7.25,14.425) 169(6.75,14.425) 170(6.25,14.425) 171(5.75,14.425) 172(5.25,14.425) 173(4.75,14.425) 174(4.25,14.425) 175(3.75,14.425) 176(3.25,14.425) 177(2.75,14.425) 178(2.25,14.425) 179(1.75,14.425) 180(1.25,14.425) 181(0.75,14.425) 182(0.25,14.425) 183(-0.25,14.425) 184(-0.75,14.425) 185(-1.25,14.425) 186(-1.75,14.425) 187(-2.25,14.425) 188(-2.75,14.425) 189(-3.25,14.425) 190(-3.75,14.425) 191(-4.25,14.425) 192(-4.75,14.425) 193(-5.25,14.425) 194(-5.75,14.425) 195(-6.25,14.425) 196(-6.75,14.425) 197(-7.25,14.425) 198(-7.75,14.425) 199(-8.25,14.425) 200(-8.75,14.425) 201(-9.25,14.425) 202(-9.75,14.425) 203(-10.25,14.425) 204(-10.75,14.425) 205(-11.25,14.425) 206(-11.75,14.425) 207(-12.25,14.425) 208(-12.75,14.425)
  silkscreen extent -16,-16 16,16, body extent -14,-14 14,14, height 1.6
TSSOP16 [mm] "Thin Small Outline Package"
  rect 0.35x1.6 smd: 1(-2.275,-2.8) 2(-1.625,-2.8) 3(-0.975,-2.8) 4(-0.325,-2.8) 5(0.325,-2.8) 6(0.975,-2.8) 7(1.625,-2.8) 8(2.275,-2.8) 9(2.275,2.8) 10(1.625,2.8) 11(0.975,2.8) 12(0.325,2.8) 13(-0.325,2.8) 14(-0.975,2.8) 15(-1.625,2.8) 16(-2.275,2.8)
  silkscreen extent -3,-4 3,4, body extent -2.55,-2.25 2.55,2.25, height 1.2
TSSOP20 [mm] "Thin Small Outline Package"
  rect 0.35x2.1 smd: 1(-2.9,-3.45) 2(-2.25,-3.45) 3(-1.6,-3.45) 4(-0.95,-3.45) 5(-0.3,-3.45) 6(0.35,-3.45) 7(1,-3.45) 8(1.65,-3.45) 9(2.3,-3.45) 10(2.95,-3.45) 11(2.95,3.45) 12(2.3,3.45) 13(1.65,3.45) 14(1,3.45) 15(0.35,3.45) 16(-0.3,3.45) 17(-0.95,3.45) 18(-1.6,3.45) 19(-2.25,3.45) 20(-2.9,3.45)
  silkscreen extent -4,-4.8 4.1,4.8, body extent -3.72,-2.8 3.78,2.8, height 2
TSSOP50P2000X120-48L [mm] "TSSOP, 48-Leads, Body 12.0x18.4mm (max), Pitch 0.50mm, IPC High Density"
  rect 1.35x0.25 smd: 1(-9.625,5.75) 2(-9.625,5.25) 3(-9.625,4.75) 4(-9.625,4.25) 5(-9.625,3.75) 6(-9.625,3.25) 7(-9.625,2.75) 8(-9.625,2.25) 9(-9.625,1.75) 10(-9.625,1.25) 11(-9.625,0.75) 12(-9.625,0.25) 13(-9.625,-0.25) 14(-9.625,-0.75) 15(-9.625,-1.25) 16(-9.625,-1.75) 17(-9.625,-2.25) 18(-9.625,-2.75) 19(-9.625,-3.25) 20(-9.625,-3.75) 21(-9.625,-4.25) 22(-9.625,-4.75) 23(-9.625,-5.25) 24(-9.625,-5.75) 25(9.625,-5.75) 26(9.625,-5.25) 27(9.625,-4.75) 28(9.625,-4.25) 29(9.625,-3.75) 30(9.625,-3.25) 31(9.625,-2.75) 32(9.625,-2.25) 33(9.625,-1.75) 34(9.625,-1.25) 35(9.625,-0.75) 36(9.625,-0.25) 37(9.625,0.25) 38(9.625,0.75) 39(9.625,1.25) 40(9.625,1.75) 41(9.625,2.25) 42(9.625,2.75) 43(9.625,3.25) 44(9.625,3.75) 45(9.625,4.25) 46(9.625,4.75) 47(9.625,5.25) 48(9.625,5.75)
  silkscreen extent -11,-7 11,7, body extent -9.2,-6 9.2,6, height 1.2

## Part data
C23 C24 C25 C26 C101 C102 C103 C104 C105 C106 C107 C108 C109 C110 C111 C112 C113 C114 C115 C116 C117 C118 C119 C120 C121 C122 C123 C201 C202 C203 C204 C205 C206 C211.A C211.B C212.A C212.B C213.A C213.B C214.A C214.B C221.A C221.B C222.A C222.B C223.A C223.B C224.A C224.B C231 C232 C233: "Capacitor"
D1 D2 D3 D4 D5 D6 D7 D8 D9 D10 D11 D12 D13: library part LED, "Typical INFRARED GaAs LED 0603"
FB101: library part FB_0402, "Ferite Bead : 0402"
P1: "Header, 8-Pin, Dual row"
P2: "Header, 12-Pin, Dual row"
P4: "Mates with FFSD-05-D-12.00-01-N"
P5: "Header, 2-Pin"
R1 R2 R3 R4 R5 R6 R7 R8 R9 R10 R46 R47 R48 R49 R50 R51 R52 R53 R54 R55 R56 R57 R58 R59 R60 R101 R102 R103 R104 R201 R202 R211.A R211.B R212.A R212.B R221.A R221.B R222.A R222.B R223.A R223.B R231 R232 R233 R234: "Resistor"
S1: "Slide switch SP3T switch"
S2: "DIP Switch - 1571983-5"
S3: "Tact Switch"
U101: "ARM7 16/32-Bit Microcontroller, 512KB Flash, 98KB RAM, 208-Lead LQFP"
U102: "16-Mbit (1M x 16) Static RAM"
U103: "FRAM, 2MB, 3V, 60NS, 44TSOP2"
U201: "512 Kbit (32Kb X 8) UV EPROM and OTP EPROM"
U202 U204: library part MIC1557, "Miniature Astable Timer Chip"
U203: "Dual Binary Up-Counter"
U211.A U211.B: "Bell 202 Compatible Modem"
U221.A U221.B: "3 Volt Integrated DTMF Receiver"
U231 U232: "Triple 2-Channnel Analog Multiplexer/Demutiplexer"
U233: "8-Channel Analog Multiplexer/Demultiplexer"
X101: library part "C.O. 4pins", "Crystal Oscillator"
X102: library part "C.O. 2pins", "Crystal Oscillator"
X211.A X211.B X221.A X221.B: "SMD Clock Oscillator, 3.579545MHz"

## Free pads (board coordinates)
  round 6 hole 3.2: 0(5,65) 1(95,65) 2(95,5) 3(5,5)
  round 1.5 hole 0.9: 0(10.25,22.61)

## Via types
v1: diameter 0.55, hole 0.3, L1 to L4, tented both sides, 370 vias
v2: diameter 0.55, hole 0.35, L1 to L4, 14 vias

## Nets (pads, with @x,y where several pads share a name; then routed paths per layer and width w, separated by ;. In a path a pad name is that pad's centre, name@x,y a point inside that pad or via, vN(x,y) a via of type N, cw(c..) or ccw(c..) an arc to the next point about the centre after c; other vN are vias at no path point)
3V3: C23.2 C24.2 C101.2 C102.2 C103.2 C104.2 C105.2 C106.2 C107.2 C108.2 C109.2 C110.2 C111.2 C112.2 C113.2 C116.2 C117.2 C118.2 C119.2 C201.1 C202.1 C203.1 C204.2 C211.A.2 C211.B.2 C212.A.2 C212.B.2 C222.A.2 C222.B.2 C223.A.1 C223.B.1 C224.A.1 C224.B.1 C231.2 C232.2 C233.2 D9.1 FB101.1 P2.1 P2.2 P2.9 P2.17 P4.1 P5.1 R1.2 R2.2 R3.2 R4.2 R5.2 R6.2 R46.1 R47.1 R48.1 R49.1 R50.1 R51.2 R102.2 R103.2 S1.1 U13.3 U101.9 U101.15 U101.24 U101.26 U101.38 U101.60 U101.71 U101.86 U101.89 U101.112 U101.125 U101.146 U101.165 U101.174 U101.181 U101.198 U102.37 U102.47 U103.11 U103.33 U201.32 U202.4 U203.16 U204.3 U204.4 U211.A.10 U211.A.12 U211.A.16 U211.B.10 U211.B.12 U211.B.16 U221.A.11 U221.A.20 U221.B.11 U221.B.20 U231.16 U232.16 U233.16 X211.A.1 X211.A.4 X211.B.1 X211.B.4 X221.A.1 X221.A.4 X221.B.1 X221.B.4 | length 150.7
  L1 w0.15: v1(1.905,57.785) 1.91,57.79 P4.1@4.468,57.79 ; R51.2@13.25,51.775 v1(14.05,51.775) ; v1(13.75,1.5) 13.75,2.422 S1.1@14.477,3.15 ; v1(14.5,12.25) R50.1@14.5,13.3 ; v1(15.2,58.75) C201.1@15.2,59.5 ; v2(16.545,59.52) U201.32@18.615,59.52 ; U203.16@18.7,41.725 v1(20.2,41.725) ; v1(20.25,47.5) C203.1@21.05,47.5 ; C117.2@28.05,7 U103.33@28.05,8.9 ; U103.33@28.1,8.95 v1(28.1,10.25) ; U204.3@28.8,42.05 v1(30,42.05) U204.4@31.2,42.05 ; U103.11@28.95,20.1 C116.2@28.95,22 v1(28.95,22.75) ; U202.4@31.2,46.05 32.05,46.05 32.25,45.85 v1(32.25,45) C202.1@33.05,45 ; v1(32.25,41.5) C204.2@33.05,41.5 ; v1(36.25,34.75) 36.75,35.25 U102.47@38.125,35.25 ; U221.B.20@37.7,48.575 v1(38.875,48.575) ; U221.B.11@37.7,54.425 v1(38.875,54.425) ; U221.A.20@37.7,59.575 v1(38.875,59.575) ; U221.A.11@37.7,65.425 v1(38.875,65.425) ; U102.37@38.125,30.25 v1(40,30.25) ; C119.2@40,28.15 v1(40,30.25) ; C118.2@40,32.05 v1(40,30.25) ; C111.2@42.95,32.25 43.5,32.25 ; v1@43,25.5 v1(42.95,25.45) C112.2@42.95,24.25 U101.181@45.075,24.25 ; v1(43,27.75) U101.174@45.075,27.75 ; v1(43.2,16.8) 42.95,16.55 C113.2@42.95,15.75 U101.198@45.075,15.75 ; v1(43.5,31.25) 43.5,32.25 ; U101.165@45.075,32.25 43.5,32.25 ; v1(46.1,47.5) C222.B.2@46.9,47.5 ; v1(46.1,48.5) C223.B.1@46.9,48.5 ; v1(46.1,58.5) C222.A.2@46.9,58.5 ; v1(46.1,59.5) C223.A.1@46.9,59.5 ; C224.B.1@47.8,52.5 v1(48.6,52.5) ; C224.A.1@47.8,63.5 v1(48.6,63.5) ; X221.B.4@49.25,53.8 v1@50.1,53.8 ; X221.A.4@49.25,64.8 v1(50.15,64.8) ; X221.A.1@49.25,66.2 v1(50.15,66.2) ; X221.B.1@49.3,55.2 v1(50.15,55.2) ; v1@51.75,35.75 U101.146@51.75,37.925 C110.2@51.75,40.05 ; C101.2@53.75,7 U101.15@53.75,9.075 v1(53.75,10.225) v1@53.75,10.35 ; U211.B.16@53.95,43.055 v1(55.96,43.055) ; U211.B.12@53.95,48.135 v1(55.96,48.135) ; U211.B.10@53.95,50.675 v1(55.96,50.675) ; U211.A.16@53.95,56.055 v1(55.96,56.055) ; U211.A.12@53.95,61.135 v1(55.96,61.135) ; U211.A.10@53.95,63.675 v1(55.96,63.675) ; v1(57.25,5.125) FB101.1@57.25,6.05 ; C102.2@58.2,7 58.25,7.05 U101.24@58.25,9.075 ; 58.25,7.625 v1(58.75,7.625) 59.25,7.625 ; U101.26@59.25,9.075 59.25,7.625 ; C103.2@59.3,7 59.25,7.05 59.25,7.625 ; v1(62.25,35.375) U101.125@62.25,37.925 C109.2@62.25,40.05 ; v1(65.25,7.475) U101.38@65.25,9.275 ; v1(65.5,51) C211.B.2@66.55,51 ; v1(65.5,64) C211.A.2@66.55,64 ; C212.B.2@66.55,47 v1(65.5,47) 65.5,46 66,45.5 66.7,45.5 X211.B.1@66.8,45.4 ; C212.A.2@66.55,60 v1(65.5,60) 65.5,59 66,58.5 66.7,58.5 X211.A.1@66.8,58.4 ; X211.B.4@68.2,45.4 68.3,45.5 v1(69.25,45.5) ; X211.A.4@68.2,58.4 68.3,58.5 v1(69.25,58.5) ; v1(68.25,35.375) 68.75,35.875 U101.112@68.75,37.925 C108.2@68.75,40.05 ; v1(72.125,14.25) U101.60@73.925,14.25 C104.2@76.05,14.25 ; v1(72.15,19.75) U101.71@73.925,19.75 C105.2@76.05,19.75 ; v1(72.75,4.25) R102.2@72.75,5.05 ; U231.16@73.2,43.725 v1(74.375,43.725) 74.375,42.75 74.125,42.5 C231.2@73.45,42.5 ; U232.16@73.2,52.225 v1(74.375,52.225) 74.375,51.375 74,51 C232.2@73.45,51 ; U233.16@73.2,60.725 v1(74.375,60.725) 74.375,59.875 74,59.5 C233.2@73.45,59.5 ; U101.86@73.925,27.25 75.375,27.25 ; U101.89@73.925,28.75 75.375,28.75 ; C106.2@76.05,27.25 75.375,27.25 ; C107.2@76.05,28.75 75.375,28.75 ; R5.2@78.875,6.825 v1(80.625,6.825) ; R6.2@78.9,8.55 v1(80.65,8.55) ; R4.2@83.075,37.025 v1(84.125,37.025) ; R3.2@83.075,38.025 v1(84.125,38.025) ; R2.2@83.075,39.025 v1(84.125,39.025) ; R1.2@83.075,40.025 v1(84.125,40.025) ; D9.1@84.175,5.4 v1(85.925,5.4) ; v1(87.25,26.75) R48.1@88.3,26.75 ; v1(87.25,27.75) R49.1@88.3,27.75 ; v1(87.25,37) R46.1@88.3,37 ; v1(87.25,38) R47.1@88.3,38 ; 75.375,27.25 v1(75.375,28) 75.375,28.75
  L1 w0.3: v1(6.475,47.55) U13.3@9.4,47.55 11.25,47.55 ; C24.2@12.3,46.5 11.5,46.5 11.25,46.75 11.25,47.55 ; C23.2@12.3,47.5 12.25,47.55 11.25,47.55 ; R103.2@13.252,52.79 v1(14.052,52.79)
  other v1: 51.75,35.5 50.15,53.8
A0: U101.79 U102.25 U103.5 | length 93.4
  L1 w0.15: v1(29.2,24.2) 31.25,26.25 v1(34.25,26.25) ; U103.5@33.7,20.05 33.7,18.8 33.9,18.6 v1(33.9,18) ; v1(36.25,24.25) U102.25@38.125,24.25 ; U101.79@73.925,23.75 v1(75.5,23.75)
  L4 w0.15: v1@29.25,24.25 v1(29.2,24.2) ; v1(33.9,18) 33.9,15.2 33.112,14.412 29.631,14.412 29.2,14.843 29.2,22.293 29.45,22.543 29.45,22.957 29.2,23.207 v1(29.2,24.2) ; v1(34.25,26.25) v1(36.25,24.25) ; v1(75.5,23.75) 75.05,23.3 48,23.3 45.05,26.25 45.05,30.7 40.45,35.3 35.55,35.3 29.2,28.95 v1(29.2,24.2)
A1: U101.83 U102.24 U103.4 | length 100.1
  L1 w0.15: U102.24@18.875,24.25 21,24.25 22.25,24.25 23.25,25.25 v1(23.25,27.25) ; v1(34.5,18.5) U103.4@34.5,20.05 ; U101.83@73.925,25.75 v1(75.75,25.75)
  L4 w0.15: v1(34.5,18.5) 34.5,15 33.5,14 29.5,14 28.9,14.6 28.9,19.925 23.25,25.575 v1(23.25,27.25) 23.25,28.5 23.5,28.75 28.576,28.75 35.426,35.6 40.574,35.6 45.35,30.824 45.35,26.385 48.135,23.6 73.6,23.6 v1(75.75,25.75)
A2: U101.97 U102.23 U103.3 | length 105.5
  L1 w0.15: U102.23@18.875,24.75 22.25,24.75 22.75,25.25 v1(22.75,26.75) ; v1(35.3,18) U103.3@35.3,20.05 ; U101.97@73.925,32.75 v1(75.75,32.75)
  L4 w0.15: v1(35.3,18) 35.3,15 33.9,13.6 29.3,13.6 28.6,14.3 28.6,19.8 22.95,25.45 22.95,26.55 v1(22.75,26.75) 22.75,29 23,29.25 28.651,29.25 35.301,35.9 40.699,35.9 45.65,30.949 45.65,26.509 48.259,23.9 69.09,23.9 75.75,30.56 v1(75.75,32.75)
A3: U101.103 U102.22 U103.2 | length 109.1
  L1 w0.15: U102.22@18.875,25.25 21,25.25 22,25.25 22.25,25.5 v1(22.25,26.25) ; v1(36.1,18.5) U103.2@36.1,20.05 ; U101.103@73.925,35.75 v1(75.5,35.75)
  L4 w0.15: v1(36.1,18.5) 36.1,15 34.3,13.2 29.1,13.2 28.3,14 28.3,19.675 22.25,25.725 v1(22.25,26.25) 22.25,29.5 22.5,29.75 28.727,29.75 35.177,36.2 40.823,36.2 45.95,31.073 45.95,26.633 48.383,24.2 68.965,24.2 75,30.235 75,35.25 v1(75.5,35.75)
A4: U101.107 U102.21 U103.1 | length 116.1
  L1 w0.15: U102.21@18.875,25.75 21.5,25.75 21.75,26 v1(21.75,26.75) ; v1(36.9,18) U103.1@36.9,20.05 ; U101.107@71.25,37.925 v1(71.25,39.5)
  L4 w0.15: v1(36.9,18) 36.9,15 34.7,12.8 28.9,12.8 28,13.7 28,19.525 21.75,25.775 v1(21.75,26.75) 21.75,29.75 22.25,30.25 28.75,30.25 35,36.5 40.947,36.5 46.25,31.197 46.25,26.757 48.507,24.5 68.841,24.5 74.7,30.359 74.7,37.05 72.75,39 71.75,39 v1(71.25,39.5)
A5: U101.113 U102.20 U103.44 | length 115.7
  L1 w0.15: U102.20@18.875,26.25 v1@21,26.25 ; U103.44@36.9,8.95 v1(36.9,10.2) ; v1(67.75,40) 68.25,39.5 68.25,39.25 U101.113@68.25,37.925
  L4 w0.15: v1(36.9,10.2) 34.7,12.4 28.7,12.4 27.7,13.4 27.7,19.4 21.25,25.85 v1(21.25,26.25) 21.25,30 22,30.75 28.826,30.75 34.876,36.8 41.071,36.8 46.55,31.321 46.55,26.882 48.632,24.8 68.717,24.8 74.4,30.483 74.4,36.926 72.626,38.7 69.05,38.7 v1(67.75,40)
A6: U101.121 U102.19 U103.43 | length 117.4
  L1 w0.15: U102.19@18.875,26.75 v1(20.75,26.75) ; U103.43@36.1,8.95 v1(36.1,10.2) ; U101.121@64.25,37.925 v1(64.25,39.25)
  L4 w0.15: v1@36.1,10.15 34.25,12 28.5,12 27.4,13.1 27.4,19.25 20.75,25.9 v1(20.75,26.75) 20.75,30.25 21.75,31.25 28.901,31.25 34.751,37.1 41.196,37.1 46.85,31.446 46.85,27.006 48.756,25.1 68.593,25.1 74.1,30.607 74.1,36.801 72.501,38.4 65.1,38.4 v1(64.25,39.25)
A7: U101.127 U102.18 U103.42 | length 119.5
  L1 w0.15: U102.18@18.875,27.25 v1(20.25,27.25) ; U103.42@35.3,8.95 v1(35.3,10.2) ; U101.127@61.25,37.925 v1(61.25,39.25)
  L4 w0.15: v1(35.3,10.2) 33.9,11.6 28.3,11.6 27.1,12.8 27.1,19.125 20.25,25.975 v1(20.25,27.25) 20.25,30.5 21.5,31.75 28.977,31.75 34.627,37.4 41.32,37.4 47.15,31.57 47.15,27.13 48.88,25.4 68.468,25.4 73.8,30.732 73.8,36.677 72.377,38.1 62.4,38.1 v1(61.25,39.25)
A8: U101.131 U102.8 U103.27 | length 116.7
  L1 w0.15: U102.8@18.875,32.25 v1(20.25,32.25) ; U103.27@23.3,8.95 v1(23.3,11) ; U101.131@59.25,37.925 v1(59.25,39.5)
  L4 w0.15: v1(23.3,11) 26.2,13.9 26.2,19.601 19.75,26.051 19.75,31.75 v1(20.25,32.25) 24.5,32.25 29.053,32.25 34.503,37.7 41.444,37.7 47.45,31.694 47.45,27.254 49.004,25.7 68.344,25.7 73.5,30.856 73.5,36.5 72.2,37.8 60.95,37.8 v1(59.25,39.5)
A9: U101.135 U102.7 U103.26 | length 119.6
  L1 w0.15: U102.7@18.875,32.75 v1(21,32.75) ; U103.26@22.5,8.95 v1(22.5,11) ; U101.135@57.25,37.925 v1(57.25,39.5)
  L4 w0.15: v1(22.5,11) 25.9,14.4 25.9,19.477 19.45,25.927 19.45,32.45 19.75,32.75 v1(21,32.75) 24.5,32.75 29.129,32.75 34.379,38 41.568,38 47.75,31.818 47.75,27.379 49.129,26 68.22,26 73.2,30.98 73.2,36.376 72.076,37.5 59.25,37.5 v1(57.25,39.5)
A10: U101.145 U102.6 U103.25 | length 123.9
  L1 w0.15: U102.6@18.875,33.25 v1(20.25,33.25) ; U103.25@21.7,8.95 v1(21.7,11) ; U101.145@52.25,37.925 52.25,39.25 v1(52.75,39.75)
  L4 w0.15: v1(21.7,11) 25.6,14.9 25.6,19.353 19.15,25.803 19.15,32.9 19.5,33.25 v1(20.25,33.25) 24.5,33.25 29.204,33.25 34.254,38.3 41.693,38.3 48.05,31.943 48.05,27.503 49.253,26.3 68.096,26.3 72.9,31.104 72.9,36.251 71.951,37.2 55.3,37.2 v1(52.75,39.75)
A11: U101.149 U102.5 U103.24 | length 126.3
  L1 w0.15: U102.5@18.875,33.75 v1(21,33.75) ; U103.24@20.9,8.95 v1(20.9,11) ; U101.149@50.25,37.925 v1@50.25,39.25
  L4 w0.15: v1(20.9,11) 25.3,15.4 25.3,19.228 18.8,25.728 18.8,33.05 19.5,33.75 v1(21,33.75) 29.28,33.75 34.13,38.6 41.817,38.6 48.35,32.067 48.35,27.627 49.377,26.6 67.971,26.6 72.6,31.229 72.6,36.127 71.827,36.9 52.85,36.9 v1(50.25,39.5)
A12: U101.155 U102.4 U103.23 | length 128.7
  L1 w0.15: U102.4@18.875,34.25 v1(20.25,34.25) ; U103.23@20.1,8.95 v1(20.1,11) ; U101.155@47.25,37.925 v1(47.25,39.5)
  L4 w0.15: v1(20.1,11) 25,15.9 25,19.104 18.5,25.604 18.5,33.25 19.5,34.25 v1(20.25,34.25) 29.356,34.25 34.006,38.9 41.941,38.9 48.65,32.191 48.65,27.751 49.501,26.9 67.847,26.9 72.3,31.353 72.3,36.003 71.901,36.401 50.349,36.401 v1(47.25,39.5)
A13: U101.159 U102.3 U103.22 | length 125.6
  L1 w0.15: U102.3@18.875,34.75 v1(21,34.75) ; v1(20.1,18.4) U103.22@20.1,20.05 ; U101.159@45.075,35.25 45.1,35.225 49.475,35.225 v1(49.5,35.25)
  L4 w0.15: v1(20.1,18.4) 22.1,16.4 23.9,16.4 24.7,17.2 24.7,18.98 18.2,25.48 18.2,33.45 19.5,34.75 v1(21,34.75) 24.5,34.75 29.432,34.75 33.882,39.2 42.065,39.2 48.95,32.315 48.95,27.876 49.626,27.2 67.723,27.2 72,31.477 72,35.75 71.75,36 50.25,36 v1(49.5,35.25)
A14: U101.173 U102.2 U103.21 | length 72
  L1 w0.15: U102.2@18.875,35.25 v1(20.25,35.25) ; v1(20.9,18.4) U103.21@20.9,20.05 ; U101.173@45.075,28.25 v1(49.75,28.25)
  L4 w0.15: v1(20.9,18.4) 22.3,17 23.9,17 24.4,17.5 24.4,18.856 17.8,25.456 17.8,33.55 19.5,35.25 v1(20.25,35.25) 29.507,35.25 33.757,39.5 42.19,39.5 49.25,32.44 49.25,28.75 v1(49.75,28.25)
A15: U101.101 U102.1 U103.20 | length 96.6
  L1 w0.15: U102.1@18.875,35.75 v1(21,35.75) ; v1(21.7,18.4) U103.20@21.7,20.05 ; v1(71.25,34.75) U101.101@73.925,34.75
  L4 w0.15: v1(21.7,18.4) 22.7,17.4 23.7,17.4 24.1,17.8 24.1,18.731 17.5,25.331 17.5,33.75 19.5,35.75 v1(21,35.75) 24.5,35.75 29.583,35.75 33.633,39.8 42.314,39.8 49.55,32.564 49.55,29.753 51.803,27.5 67.599,27.5 71.7,31.601 71.7,34.3 v1(71.25,34.75)
A16: U101.104 U102.48 U103.19 | length 111.9
  L1 w0.15: v1(20.25,36.25) 33,36.25 33.5,35.75 U102.48@38.125,35.75 ; v1(22.5,18.4) U103.19@22.5,20.05 ; v1(71.25,35.5) 72,36.25 U101.104@73.925,36.25
  L4 w0.15: v1(22.5,18.4) 23.1,17.8 23.5,17.8 23.8,18.1 23.8,18.607 17.2,25.207 17.2,34.15 19.3,36.25 v1(20.25,36.25) 29.659,36.25 33.509,40.1 42.438,40.1 49.85,32.688 49.85,29.877 51.927,27.8 67.474,27.8 70.75,31.076 70.75,35 v1(71.25,35.5)
A17: U101.105 U102.17 U103.18 | length 96.3
  L1 w0.15: v1(16.5,27.75) U102.17@18.875,27.75 ; v1(23.3,18.4) U103.18@23.3,20.05 ; v1(70.25,35.5) 71.25,36.5 71.75,36.5 72.25,37 U101.105@72.25,37.925 v1(72.25,39.5)
  L4 w0.15: v1(23.3,18.4) 16.5,25.2 v1(16.5,27.75) 16.5,27.85 16.9,28.25 16.9,34.274 19.701,37.075 30.06,37.075 33.385,40.4 42.562,40.4 50.15,32.812 50.15,30.001 52.051,28.1 67.35,28.1 70.25,31 v1(70.25,35.5)
A18: U101.111 U102.16 | length 79.1
  L1 w0.15: v1(16.275,28.55) 16.575,28.25 U102.16@18.875,28.25 ; v1(69.25,35.5) U101.111@69.25,37.925
  L4 w0.15: v1@16.275,28.525 16.6,28.85 16.6,34.399 19.576,37.375 29.935,37.375 33.26,40.7 42.687,40.7 50.45,32.937 50.45,30.126 52.176,28.4 67.226,28.4 69.25,30.424 v1(69.25,35.5)
A19: U101.109 U102.9 | length 74.6
  L1 w0.15: v1(17.5,36.25) 17.5,32 17.75,31.75 U102.9@18.875,31.75 ; v1(68.25,33.5) 69.75,35 69.75,36 70.25,36.5 U101.109@70.25,37.925
  L4 w0.15: v1(17.5,36.25) 18.925,37.675 29.811,37.675 33.136,41 42.811,41 50.75,33.061 50.75,30.25 52.3,28.7 67.101,28.7 68.25,29.849 v1(68.25,33.5)
ADDRESS0: U201.11 U203.3 | length 11.8
  L1 w0.15: U203.3@24.3,43.025 26.003,43.025 27.397,44.419 27.397,48.229 28.615,49.447 U201.11@28.615,52.06
ADDRESS1: U201.10 U203.4 | length 10.7
  L1 w0.15: U203.4@24.3,43.675 26.145,43.675 27.016,44.546 27.016,48.483 27.345,48.812 U201.10@27.345,52.06
ADDRESS2: U201.9 U203.5 | length 10
  L1 w0.15: U203.5@24.3,44.325 26.16,44.325 26.635,44.8 26.635,48.194 26.075,48.754 U201.9@26.075,52.06
ADDRESS3: U201.8 U203.6 U203.10 | length 15.3
  L1 w0.15: U203.10@18.7,45.625 22.475,45.625 23.125,44.975 U203.6@24.3,44.975 25.921,44.975 26.254,45.308 26.254,47.975 24.805,49.424 U201.8@24.805,52.06
ADDRESS4: U201.7 U203.11 | length 11.9
  L1 w0.15: U203.11@18.7,44.975 17.775,44.975 17.6,45.15 17.6,47.322 18.38,48.102 20.652,48.102 23.535,50.985 U201.7@23.535,52.06
ADDRESS5: U201.6 U203.12 | length 12.4
  L1 w0.15: U203.12@18.7,44.325 17.6,44.325 17.275,44.65 17.275,47.505 18.253,48.483 20.609,48.483 22.265,50.139 U201.6@22.265,52.06
ADDRESS6: U201.5 U203.13 | length 12.8
  L1 w0.15: U203.13@18.7,43.675 17.6,43.675 16.975,44.3 16.975,47.629 18.129,48.783 20.483,48.783 20.995,49.295 U201.5@20.995,52.06
ADDRESS7: U201.4 U203.14 | length 13.8
  L1 w0.15: U201.4@18.615,54.44 16.625,52.45 16.625,43.842 17.442,43.025 U203.14@18.7,43.025
AFSK1_RX: R211.A.2 U232.12 | length 11.2
  L1 w0.15: R211.A.2@67.45,61 69.5,61 70,60.5 70,55.5 70.675,54.825 U232.12@73.2,54.825
AFSK1_TX: U211.A.7 U233.14 | length 14.9
  L1 w0.15: v1(61.04,63.04) 61.675,63.675 U211.A.7@63.05,63.675 ; v1(71.45,62.025) U233.14@73.2,62.025
  L4 w0.15: v1(61.04,63.04) 70.435,63.04 v1(71.45,62.025)
AFSK2_RX: R211.B.2 U232.13 | length 11.2
  L1 w0.15: R211.B.2@67.45,48 69.5,48 70,48.5 70,53.375 70.8,54.175 U232.13@73.2,54.175
AFSK2_TX: U211.B.7 U233.15 | length 22.5
  L1 w0.15: v1(61.04,50.04) 61.675,50.675 U211.B.7@63.05,50.675 ; 72.1,61.375 U233.15@73.2,61.375
  L4 w0.15: v1(61.04,50.04) 66.12,50.04 67.39,51.31 67.39,57.64 71.125,61.375 v1(71.775,61.375)
BCN: R201.1 U202.5 U233.13 | length 66.5
  L1 w0.15: U202.5@31.2,47.95 31.925,47.95 ; R201.1@33.95,47 34.65,47 34.85,47.2 34.85,47.7 34.6,47.95 31.925,47.95 ; U233.13@73.2,62.675 71.125,62.675 70.5,63.3 70.5,66.25 69.5,67.25 36.85,67.25 31.95,62.35 31.95,47.975 31.925,47.95
BLS0: U101.119 U102.15 U103.39 | length 113.7
  L1 w0.15: U103.39@32.9,8.95 32.9,6.875 32.1,6.075 19.425,6.075 17.775,7.725 17.775,21.775 18.75,22.75 22.901,22.75 23.2,23.049 23.2,23.073 23.925,23.798 23.925,28.325 23.5,28.75 U102.15@18.875,28.75 17.02,28.75 16,29.77 16,36.75 17.225,37.975 45.025,37.975 v1(45.95,38.9) ; v1(48.65,36.025) 48.675,36.05 49.831,36.05 51.281,34.6 63.6,34.6 65.25,36.25 U101.119@65.25,37.925
  L4 w0.15: v1(45.95,38.9) 48.65,36.2 v1(48.65,36.025)
BLS1: U101.139 U102.14 U103.40 | length 105.3
  L1 w0.15: v1(17.5,22.8) 17.475,22.775 17.475,7.525 19.225,5.775 32.6,5.775 33.7,6.875 U103.40@33.7,8.95 ; v1(18.675,21.625) 19.5,22.45 23.026,22.45 23.5,22.924 23.5,22.949 24.225,23.674 24.225,28.7 23.675,29.25 U102.14@18.875,29.25 16.944,29.25 16.3,29.894 16.3,36.626 17.349,37.675 45.5,37.675 46.525,36.65 49.893,36.65 51.543,35 51.957,35 53.3,35 55.25,36.95 U101.139@55.25,37.925
  L4 w0.15: v1(17.5,22.8) v1(18.675,21.625)
CLR: U201.14 U203.7 U203.15 | length 25
  L1 w0.15: U203.15@18.7,42.375 v1(20.85,42.375) ; U203.7@24.3,45.625 v1(25.725,45.625) ; U201.14@33.535,54.44 v2@35.4,54.44
  L4 w0.15: v1(20.85,42.375) 22.475,42.375 v1(25.725,45.625) 26.575,45.625 v2(35.4,54.45)